# Altium PCB MATRIX-x4.PcbDoc
Units mm, origin at the board's own origin, x right, y up, seen from the top; angles counter-clockwise.
Board outline 140.67 x 35.33 mm, 2 copper layers (Top Layer, Bottom Layer); 23 components, 78 nets, 209 pads, 35 vias.
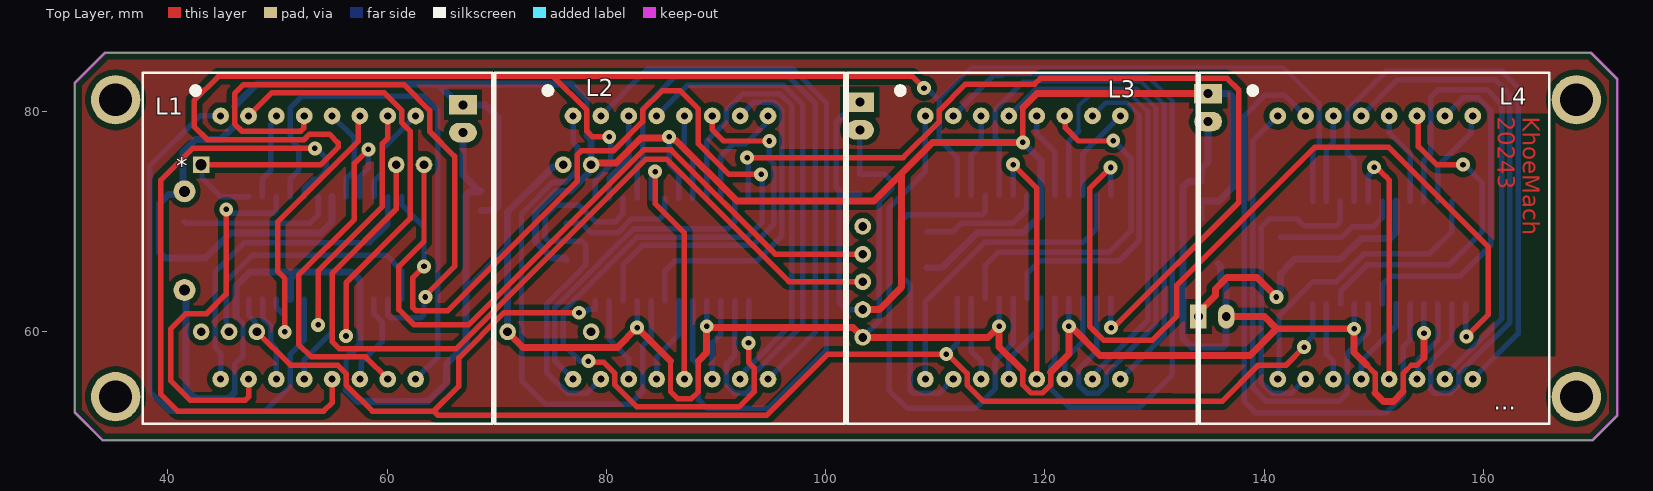
[diagram p0: Top Layer view]
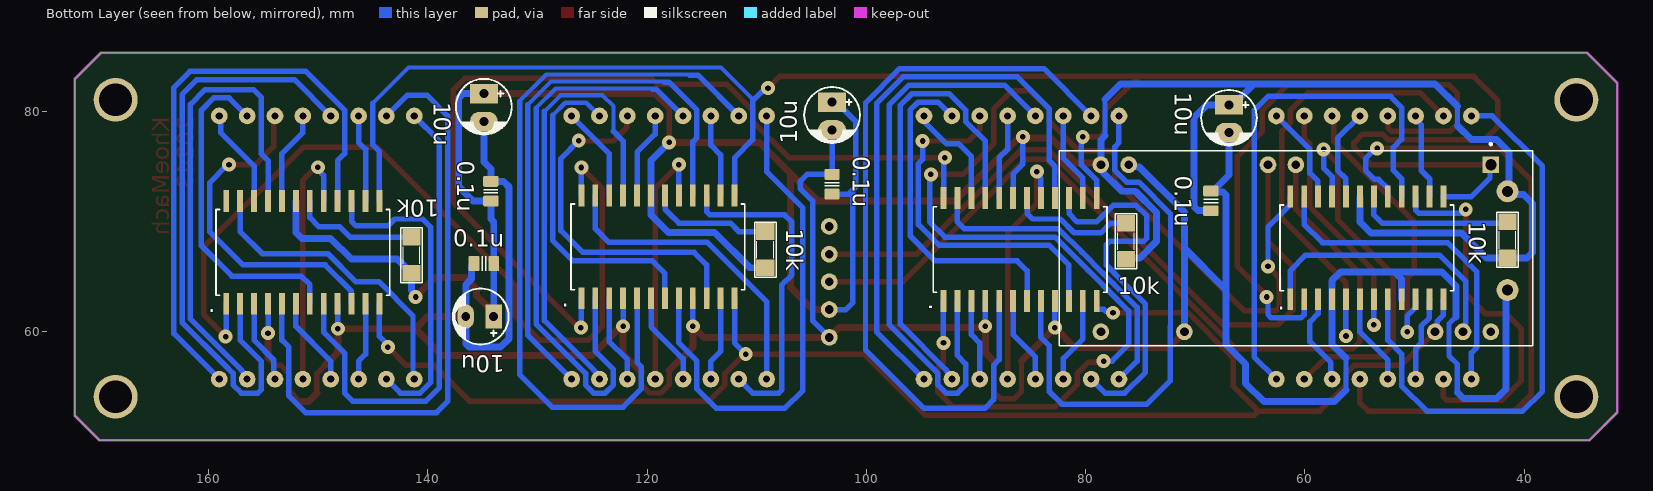
[diagram p1: Bottom Layer view, seen from below]
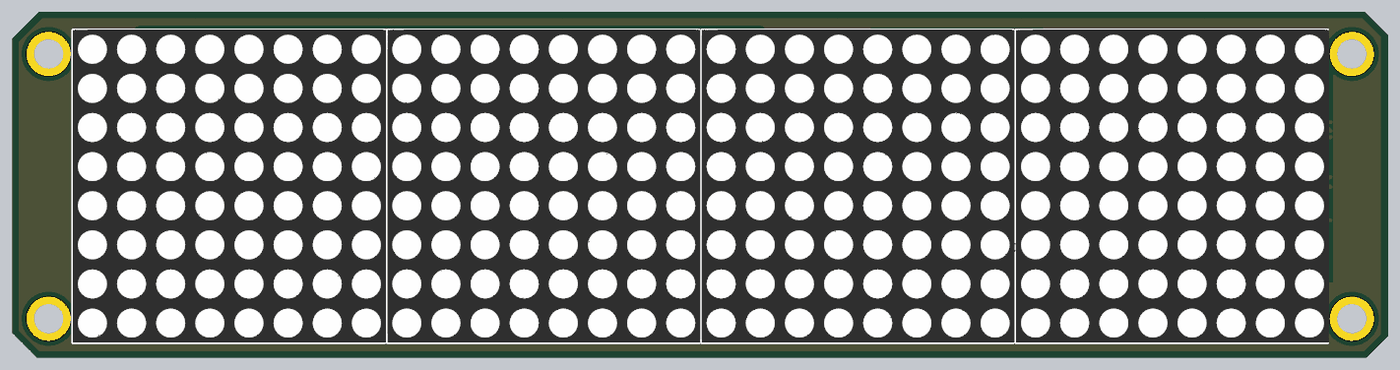
[diagram p2: 3D render of the assembled board from above, using the file's embedded part models]
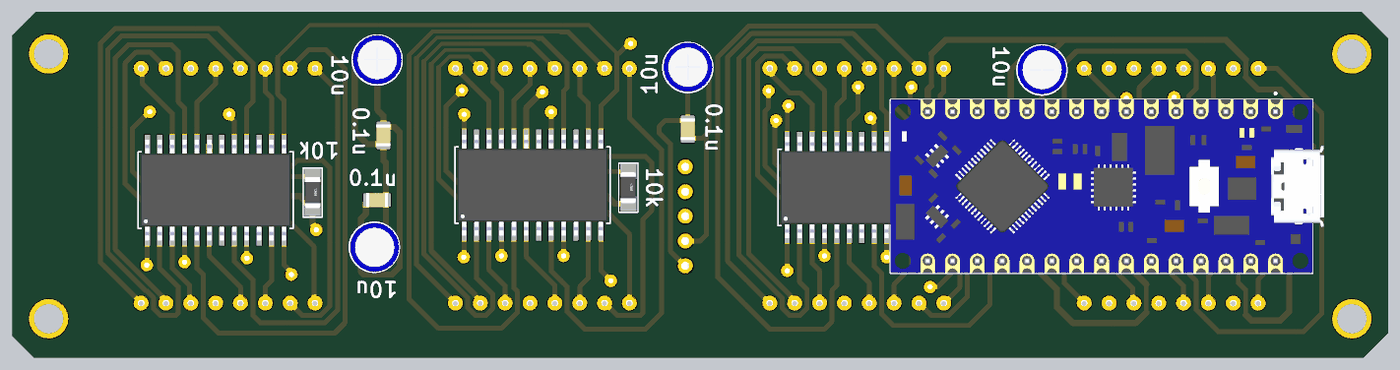
[diagram p3: 3D render of the assembled board from below, using the file's embedded part models]

## Layer stack, top to bottom
Top Solder: solder mask 0.0102, Solder Resist, Dk 3.5
Top Layer: signal copper 0.0356
Dielectric 1: dielectric 0.32, FR-4, Dk 4.8
Bottom Layer: signal copper 0.0356
Bottom Solder: solder mask 0.0102, Solder Resist, Dk 3.5

## Board outline
34.061,50.063 31.521,52.603 31.521,82.626 34.29,85.395 169.774,85.395 172.187,82.982 172.187,52.299 169.951,50.063

## Design rules (kind name [scope] priority, off if disabled: settings)
Clearance [All] p1: gap=0.254 ignorepadtopadclearanceinfootprint=FALSE except(0.508: Arc-Fill Arc-Poly Arc-Region Track-Fill Track-Poly Track-Region SMDPad-Fill SMDPad-Poly SMDPad-Region THPad-Fill THPad-Poly THPad-Region Via-Fill Via-Poly Via-Region Fill-Fill Fill-Poly Fill-Region Poly-Poly Poly-Region Region-Region)
PolygonConnect [All] p1: connectstyle=Relief reliefconductorwidth=0.254 reliefentries=4 polygonreliefangle="90 Angle" airgapwidth=0.254
RoutingVias [All] p1: holewidth=0.711 width=1.27 viastyle="Through Hole" minholewidth=0.5 minwidth=1.27 maxholewidth=0.711 maxwidth=1.27
SilkToSolderMaskClearance [IsText] p1: minsilkscreentomaskgap=0.254 clearancetoexposedcopper=TRUE
SolderMaskExpansion [All] p1: expansion=0.102 istentingtop=FALSE
Width [All] p1: maxlimit=1 minlimit=0.254 preferedwidth=0.5
29 further rules are at their usual default settings.

## Classes and differential pairs
component class MATRIX-x1: 0.1u 10k 10u * . L1 L2 L3 L4

## Components (designator, comment, footprint, x,y, rotation, side; value= is the part's Value field where it differs from the comment)
0.1u "approved sub OK" CAPC2012X135N 134.239,72.771 r90 bottom value=0.1uF (schematic designator C8)
0.1u "approved sub OK" CAPC2012X135N 134.874,66.167 r0 bottom value=0.1uF (schematic designator C6)
0.1u "approved sub OK" CAPC2012X135N 68.58,71.882 r90 bottom value=0.1uF (schematic designator C4)
0.1u "approved sub OK" CAPC2012X135N 103.124,73.406 r90 bottom value=0.1uF (schematic designator C2)
10k "10K" SM-RES-1206 109.22,69.088 r270 bottom value="R1/4W - 1K" (schematic designator R4)
10k "10K" SM-RES-1206 141.478,68.58 r270 bottom value="R1/4W - 1K" (schematic designator R3)
10k "10K" SM-RES-1206 41.529,69.977 r270 bottom value="R1/4W - 1K" (schematic designator R2)
10k "10K" SM-RES-1206 76.327,69.85 r270 bottom value="R1/4W - 1K" (schematic designator R1)
10u "10uF" CP1/2#1 134.874,81.661 r270 bottom (schematic designator C7)
10u "10uF" CP1/2#2 133.985,61.341 r0 bottom (schematic designator C5)
10u "10uF" CP1/2#1 66.929,80.645 r270 bottom (schematic designator C3)
10u "10uF" CP1/2#1 103.124,80.899 r270 bottom (schematic designator C1)
* "module- mini360" MODULE-MINI360 49.022,68.199 r0 top
. "MAX7219" MAX7219 151.384,67.31 r90 bottom (schematic designator M4)
. "MAX7219" MAX7219 118.999,67.818 r90 bottom (schematic designator M3)
. "MAX7219" MAX7219 85.979,67.577 r90 bottom (schematic designator M2)
. "MAX7219" MAX7219 54.356,67.717 r90 bottom (schematic designator M1)
A1 "ARDUINO-NANO" ARDUINO-NANO 60.579,67.945 r0 bottom
D1 "DS1307" DS1307-MODULE 116.378,65.436 r180 bottom
L1 "LEDMATRIX-8X8" LEDMATRIX_8X8 53.213,67.818 r0 top
L2 "LEDMATRIX-8X8" LEDMATRIX_8X8 85.344,67.821 r0 top
L3 "LEDMATRIX-8X8" LEDMATRIX_8X8 117.475,67.821 r0 top
L4 "LEDMATRIX-8X8" LEDMATRIX_8X8 149.606,67.821 r0 top

## Footprints (in the part's own frame and the unit in brackets; to place one, negate y for a bottom-side part, rotate by r counter-clockwise, add the part's x,y. Pads: shape width x height; smd on the part's side, far side on the other; paste and mask are expansions set on the pad)
ARDUINO-NANO [mil]
  rect 60x60 / inner round 60 / far side rect 60x60 hole 40: 1(-690,-285)
  round 60 hole 31.5: 8(10,-285) 9(110,-285) 14(610,-285) 15(710,-285) 16(710,315) 19(410,315) 28(-490,315) 29(-590,315) 30(-690,315)
  silkscreen extent -840,-363 860,365, body extent -885,-335 860,365, height 236
CAPC2012X135N [mm] "Chip Capacitor, Body 2.0x1.2mm, EIA 0805, IPC Medium Density"
  round 0.254 on Mech15: 0(0,0)
  rrect25% 1x1.4 smd: 1(-0.9,0) 2(0.9,0)
  Top Layer pour cut-out: -0.675,0.7 -0.475,0.9 0.475,0.9 0.675,0.7 0.675,-0.7 0.475,-0.9 -0.475,-0.9 -0.675,-0.7
  silkscreen extent -0.15,-0.65 0.15,0.65, body extent -1.1,-0.72 1.1,0.73, height 1.34
CP1/2#1 [mil]
  rect 70x100 hole 32: 1(0,0)
  oval 70x100 hole 32: 2(100,0)
  silkscreen extent -53,-100 146,100, body extent -54,-99 144,100, height 296
CP1/2#2 [mil]
  rect 59.06x86.61 hole 32: 1(0,0)
  oval 59.06x86.61 hole 32: 2(100,0)
  silkscreen extent -53,-100 147,100, body extent -54,-99 144,100, height 296
DS1307-MODULE [mm]
  round 1.524 hole 0.8 mask+0.15: DS(13,4.12) GND(13,-6) SCL(13,1.58) SDA(13,-0.92) VCC(13,-3.46)
LEDMATRIX_8X8 [mil] "3mm"
  round 60 hole 25.59: C1(-30,464.88) C2(-130,-480) C3(-30,-480) C4(270,464.88) C5(170,-480) C6(170,464.88) C7(-230,464.88) C8(-330,464.88) R1(370,464.88) R2(-130,464.88) R3(370,-480) R4(70,464.88) R5(-330,-480) R6(270,-480) R7(-230,-480) R8(70,-480)
  silkscreen extent -610,-640 645,620, body extent -610,-639 650,621, height 239
MAX7219 [mil]
  rect 78x21 smd: 1(-189.5,275) 2(-189.5,225) 3(-189.5,175) 4(-189.5,125) 5(-189.5,75) 6(-189.5,25) 7(-189.5,-25) 8(-189.5,-75) 9(-189.5,-125) 10(-189.5,-175) 11(-189.5,-225) 12(-189.5,-275) 13(179.5,-275) 14(179.5,-225) 15(179.5,-175) 16(179.5,-125) 17(179.5,-75) 18(179.5,-25) 19(179.5,25) 20(179.5,75) 21(179.5,125) 22(179.5,175) 23(179.5,225) 24(179.5,275)
  silkscreen extent -159,-312 149,312, body extent -208,-303 198,303, height 104
MODULE-MINI360 [mm]
  round 2 hole 1 mask+0: 3(-7.493,4.555) 4(-7.493,-4.445)
SM-RES-1206 [mil]
  rect 60x65 smd: 1(0,0) 2(130,0)
  silkscreen extent -34,-38 164,39, body extent 2,-31 128,31, height 40

## Part data
0.1u 0.1u 0.1u 0.1u: library part "CAP C_0805", "Capacitor SMD Cer 1.8nF 10% 50V X7R 0805", Manufacturer 1="AVX Corporation", Manufacturer Part Number 1=08055C182KAT2A, Operating Temperature="-55°C ~ 125°C", Package / Case="0805 (2012 metric)", Ratings="50V; X7R", Supplier Part Number 1=478-1374-1-ND, Tolerance=±10%, SCDType=source*, Supplier 1=Digi-Key
10k 10k 10k 10k: library part R, "Resistor 1/4W"
10u 10u 10u 10u: library part "CAP hoa", "Cap"
D1: library part DS1307_MODULE

## Free pads (board coordinates)
  round 4.5 / inner round 4 / far side round 4 hole 3: ""(35.255,54.026) ""(35.255,81.102) ""(168.453,54.026) ""(168.453,81.102)

## Via types
v1: diameter 1.27, hole 0.508, Top Layer to Bottom Layer, 35 vias

## Nets (pads, with @x,y where several pads share a name; then routed paths per layer and width w, separated by ;. In a path a pad name is that pad's centre, name@x,y a point inside that pad or via, vN(x,y) a via of type N, cw(c..) or ccw(c..) an arc to the next point about the centre after c; other vN are vias at no path point)
5V: 0.1u.1 10k.2 10u.1 *.3 ..19 A1.15 D1.VCC | length 289.3
  Top Layer w0.483: v1(117.983,77.216) 117.983,80.391
  Top Layer w0.635: A1.15 78.778,75.349 80.887,75.349 83.146,77.609 86.012,77.609 86.214,77.406 86.347,77.406 91.897,71.857 104.391,71.857 106.934,74.399 ; D1.VCC 104.902,61.976 106.934,64.008 106.934,74.399 ; v1(117.983,77.216) 109.751,77.216 106.934,74.399 ; 117.983,80.391 119.253,81.661 10u.1@134.874,81.661 ; 10u.1@133.985,61.341 133.985,61.691 135.53,63.236 135.53,63.852 136.575,64.897 139.319,64.897 v1(141.097,63.119)
  Bottom Layer w0.483: 46.097,78.736 46.097,80.514 ; 78.228,77.83 78.228,81.132
  Bottom Layer w0.5: v1(85.725,77.724) 85.725,75.23 86.614,74.341 ..19@86.614,72.136 ; 0.1u.1@103.124,72.506 101.611,72.506 101.219,72.898 ; 10u.1@103.124,80.899 102.743,80.899 100.965,79.121 100.965,73.152 101.219,72.898 ; D1.VCC 101.854,61.976 101.219,62.611 101.219,72.898
  Bottom Layer w0.635: 46.097,78.736 44.831,77.47 42.545,77.47 41.402,76.327 41.402,72.881 *.3 41.242,72.467 40.082,72.467 39.243,71.628 39.243,67.183 39.751,66.675 41.529,66.675 43.434,66.675 45.72,68.961 53.975,68.961 54.991,69.977 ..19@54.991,72.276 ; 46.097,80.514 48.133,82.55 64.643,82.55 ; 0.1u.1@68.58,70.982 68.605,71.007 69.737,71.007 70.104,71.374 70.104,79.502 68.961,80.645 66.929,80.645 66.548,80.645 64.643,82.55 ; 10k.2@76.327,66.548 76.187,66.688 75.044,66.688 73.533,68.199 73.533,70.815 75.481,72.763 76.7,72.763 78.417,74.48 78.417,74.988 A1.15 78.613,77.445 78.228,77.83 ; 78.228,81.132 76.81,82.55 64.643,82.55 ; 10k.2@109.22,65.786 110.617,65.786 113.843,69.012 118.034,69.012 119.634,70.612 119.634,72.377 119.634,75.565 v1(117.983,77.216) ; 10u.1@133.985,61.341 133.974,61.352 133.974,66.167 133.974,69.966 134.239,70.231 134.239,71.871 135.851,71.871 137.168,73.188 137.168,81.272 136.779,81.661 10u.1@134.874,81.661 ; v1(141.097,63.119) 141.097,63.327 141.478,63.708 141.478,65.278 141.541,65.278 141.986,65.722 141.986,65.786 142.773,66.573 146.964,66.573 148.844,68.453 151.472,68.453 152.019,69 ..19@152.019,71.869
A1: ..14@48.641,72.276 L1.R2 | length 7.9
  Bottom Layer w0.5: ..14@48.641,72.276 48.641,73.902 49.399,74.66 49.399,76.081 49.403,76.085 49.403,78.841 49.911,79.349 L1.R2
A2: ..14@80.264,72.136 L2.R2 | length 8.2
  Bottom Layer w0.5: ..14@80.264,72.136 80.281,72.153 80.281,73.995 82.042,75.756 L2.R2
A3: ..14@113.284,72.377 L3.R2 | length 7.6
  Bottom Layer w0.5: ..14@113.284,72.377 113.284,76.073 114.173,76.962 L3.R2
A4: ..14@145.669,71.869 L4.R2 | length 8
  Bottom Layer w0.5: ..14@145.669,71.869 145.669,76.581 146.304,77.216 L4.R2
B1: ..16@51.181,72.276 L1.R3 | length 48.5
  Bottom Layer w0.5: ..16@51.181,72.276 51.181,73.902 51.939,74.66 51.939,76.77 51.185,77.524 51.185,80.395 52.197,81.407 63.373,81.407 64.639,80.141 64.639,57.654 L1.R3
B2: ..16@82.804,72.136 L2.R3 | length 53.2
  Bottom Layer w0.5: ..16@82.804,72.136 82.804,75.057 83.312,75.565 83.312,80.264 86.233,83.185 96.647,83.185 99.06,80.772 99.06,59.947 L2.R3
B3: ..16@115.824,72.377 L3.R3 | length 52
  Bottom Layer w0.381: 118.425,82.719 118.485,82.779 128.754,82.779 130.869,80.664
  Bottom Layer w0.5: ..16@115.824,72.377 115.824,77.272 115.447,77.649 115.447,80.153 118.013,82.719 118.425,82.719 ; L3.R3 130.869,59.625 130.869,80.664
B4: ..16@148.209,71.869 L4.R3 | length 54.5
  Bottom Layer w0.5: ..16@148.209,71.869 148.209,75.565 147.574,76.2 147.574,80.149 151.11,83.685 161.679,83.685 163.15,82.214 163.15,59.775 L4.R3
C1: ..20@56.261,72.276 L1.R4 | length 8.5
  Bottom Layer w0.5: L1.R4 57.019,77.598 57.019,74.66 56.261,73.902 ..20@56.261,72.276
C2: ..20@87.884,72.136 L2.R4 | length 7.8
  Bottom Layer w0.5: L2.R4 87.122,76.581 87.884,75.819 ..20@87.884,72.136
C3: ..20@120.904,72.377 L3.R4 | length 7.9
  Bottom Layer w0.5: L3.R4 119.253,77.978 120.904,76.327 ..20@120.904,72.377
C4: ..20@153.289,71.869 L4.R4 | length 8.5
  Bottom Layer w0.5: L4.R4 151.384,78.105 153.289,76.2 ..20@153.289,71.869
CLK: ..13 A1.1 | length 176.6
  Top Layer w0.5: A1.1 53.975,75.184 55.546,76.755 55.546,77.169 54.737,77.978 52.933,77.978 52.413,77.458 43.612,77.458 42.418,78.652 42.418,81.026 44.628,83.236 75.146,83.236 ; v1(80.264,77.724) 78.74,77.724 78.232,78.232 78.232,80.149 75.146,83.236 ; v1(108.966,82.169) 107.899,83.236 75.146,83.236
  Bottom Layer w0.381: 110.367,81.157 113.259,84.049 141.757,84.049 145.03,80.776
  Bottom Layer w0.5: A1.1 43.129,75.108 43.129,73.965 44.818,72.276 ..13@47.371,72.276 ; ..13@78.994,72.136 78.994,73.775 80.391,75.172 80.391,77.597 v1(80.264,77.724) ; v1(108.966,82.169) 109.174,82.169 109.539,81.804 109.56,81.804 110.207,81.157 110.367,81.157 110.367,77.459 112.014,75.812 ..13@112.014,72.377 ; ..13@144.399,71.869 144.399,76.377 145.03,77.008 145.03,80.776
D1: ..23@60.071,72.276 L1.R5 | length 30.1
  Bottom Layer w0.5: L1.R5 44.831,58.032 44.327,58.536 44.327,65.409 46.99,68.072 58.42,68.072 60.071,69.723 ..23@60.071,72.276
D2: ..23@91.694,72.136 L2.R5 | length 29
  Bottom Layer w0.5: L2.R5 75.311,57.28 75.311,62.165 77.497,64.351 78.41,65.265 80.346,67.2 82.48,69.334 91.051,69.334 91.694,69.977 ..23@91.694,72.136
D3: ..23@124.714,72.377 L3.R5 | length 28.5
  Bottom Layer w0.5: L3.R5 109.093,62.688 114.528,68.123 123.495,68.123 124.714,69.342 ..23@124.714,72.377
D4: ..23@157.099,71.869 L4.R5 | length 27.5
  Bottom Layer w0.5: L4.R5 141.338,55.743 141.338,61.406 144.456,64.524 146.566,64.524 149.104,67.062 155.073,67.062 157.099,69.088 ..23@157.099,71.869
DIG01: ..2@60.071,62.904 L1.C1 | length 55.3
  Top Layer w0.5: L1.C1 52.414,79.589 52.414,78.525 52.121,78.232 46.779,78.232 46.105,78.906 46.105,81.665 46.922,82.482 61.546,82.482 63.881,80.146 63.881,78.232 66.167,75.946 66.167,65.913 63.496,63.242 v1(63.496,63.119)
  Bottom Layer w0.5: ..2@60.071,62.904 60.088,62.887 60.088,61.507 60.381,61.214 63.08,61.214 63.373,61.507 63.373,62.996 v1(63.496,63.119)
DIG02: ..2@91.694,62.763 L2.C1 | length 53.7
  Bottom Layer w0.5: L2.C1 87.376,82.423 96.15,82.423 97.909,80.664 97.909,60.586 93.476,56.153 93.476,55.113 92.726,54.363 91.678,54.363 90.936,55.105 90.936,57.027 91.694,57.785 ..2@91.694,62.763
DIG03: ..2@124.714,63.005 L3.C1 | length 54
  Bottom Layer w0.381: 119.462,82.084 119.521,82.144 128.322,82.144 130.115,80.351
  Bottom Layer w0.5: L3.C1 119.168,82.084 119.462,82.084 ; ..2@124.714,63.005 124.714,58.166 123.067,56.519 123.067,55.105 123.809,54.363 124.857,54.363 125.607,55.113 125.607,56.153 130.115,60.661 130.115,80.351
DIG04: ..2@157.099,62.497 L4.C1 | length 55.5
  Bottom Layer w0.5: L4.C1 152.146,82.931 161.036,82.931 162.396,81.571 162.396,60.796 158.495,56.895 158.48,56.895 157.738,56.153 157.738,55.113 156.988,54.363 155.491,54.363 155.198,54.656 155.198,57.281 157.099,59.182 ..2@157.099,62.497
DIG11: ..11@48.641,62.904 L1.C2 | length 7.8
  Bottom Layer w0.5: ..11@48.641,62.904 48.658,62.887 48.658,61.21 49.407,60.46 49.407,58.902 49.911,58.398 L1.C2
DIG12: ..11@80.264,62.763 L2.C2 | length 7.9
  Bottom Layer w0.5: ..11@80.264,62.763 80.264,59.309 82.042,57.531 L2.C2
DIG13: ..11@113.284,63.005 L3.C2 | length 7.7
  Bottom Layer w0.5: ..11@113.284,63.005 113.284,58.166 114.173,57.277 L3.C2
DIG14: ..11@145.669,62.497 L4.C2 | length 7.1
  Bottom Layer w0.5: ..11@145.669,62.497 145.669,57.912 146.304,57.277 L4.C2
DIG21: ..6@54.991,62.904 L1.C3 | length 8.3
  Bottom Layer w0.5: L1.C3 52.451,57.392 54.991,59.932 ..6@54.991,62.904
DIG22: ..6@86.614,62.763 L2.C3 | length 8
  Bottom Layer w0.5: L2.C3 84.582,57.658 86.614,59.69 ..6@86.614,62.763
DIG23: ..6@119.634,63.005 L3.C3 | length 8.6
  Bottom Layer w0.5: L3.C3 116.713,57.481 119.634,60.402 ..6@119.634,63.005
DIG24: ..6@152.019,62.497 L4.C3 | length 8.2
  Bottom Layer w0.5: L4.C3 148.844,57.277 152.019,60.452 ..6@152.019,62.497
DIG31: ..7@53.721,62.904 L1.C4 | length 24
  Top Layer w0.5: v1(53.715,60.573) 53.715,65.501 59.559,71.345 59.559,77.085 60.071,77.597 L1.C4
  Bottom Layer w0.5: v1(53.715,60.573) 53.718,60.576 53.718,62.901 ..7@53.721,62.904
DIG32: ..7@85.344,62.763 L2.C4 | length 30.8
  Bottom Layer w0.5: ..7@85.344,62.763 85.344,65.507 86.258,66.421 93.726,66.421 96.008,68.703 96.008,80.153 95.266,80.895 93.468,80.895 L2.C4
DIG33: ..7@118.364,63.005 L3.C4 | length 30.4
  Bottom Layer w0.381: L3.C4 125.539,80.835 127.457,80.835 128.607,79.686
  Bottom Layer w0.5: ..7@118.364,63.005 118.364,65.278 119.507,66.421 126.746,66.421 128.607,68.282 128.607,79.686
DIG34: ..7@150.749,62.497 L4.C4 | length 30.8
  Bottom Layer w0.5: ..7@150.749,62.497 150.749,64.237 151.536,65.024 157.861,65.024 160.647,67.81 160.647,80.145 159.512,81.28 158.115,81.28 L4.C4
DIG41: ..3@58.801,62.904 L1.C5 | length 8.4
  Bottom Layer w0.5: L1.C5 57.646,55.741 57.646,57.138 59.559,59.051 59.559,60.849 58.812,61.597 58.812,62.893 ..3@58.801,62.904
DIG42: ..3@90.424,62.763 L2.C5 | length 7.5
  Bottom Layer w0.5: L2.C5 89.662,58.928 90.424,59.69 ..3@90.424,62.763
DIG43: ..3@123.444,63.005 L3.C5 | length 8.1
  Bottom Layer w0.5: L3.C5 121.793,57.404 123.444,59.055 ..3@123.444,63.005
DIG44: ..3@155.829,62.497 L4.C5 | length 7.7
  Bottom Layer w0.5: L4.C5 154.043,55.748 154.043,57.396 155.829,59.182 ..3@155.829,62.497
DIG51: ..10@49.911,62.904 L1.C6 | length 26.3
  Top Layer w0.5: v1(50.673,59.944) 50.673,64.848 50.018,65.503 50.018,69.957 57.399,77.338 57.399,79.494 L1.C6
  Bottom Layer w0.5: ..10@49.911,62.904 49.911,62.18 50.673,61.418 v1(50.673,59.944)
DIG52: ..10@81.534,62.763 L2.C6 | length 33.2
  Top Layer w0.5: L2.C6 89.662,78.359 90.678,77.343 v1(94.869,77.343)
  Bottom Layer w0.5: ..10@81.534,62.763 81.534,66.04 83.312,67.818 93.345,67.818 95.246,69.719 95.246,75.29 94.869,75.667 v1(94.869,77.343)
DIG53: ..10@114.554,63.005 L3.C6 | length 32.5
  Top Layer w0.5: L3.C6 121.854,79.568 121.854,78.552 123.063,77.343 126.198,77.343 v1(126.225,77.37)
  Bottom Layer w0.5: ..10@114.554,63.005 114.554,66.04 115.697,67.183 125.857,67.183 127.853,69.179 127.853,75.742 v1(126.225,77.37)
DIG54: ..10@146.939,62.497 L4.C6 | length 30.8
  Top Layer w0.5: L4.C6 154.051,79.502 154.051,76.835 155.702,75.184 v1(158.115,75.184)
  Bottom Layer w0.5: ..10@146.939,62.497 146.956,62.513 146.956,63.644 149.352,66.04 156.845,66.04 159.893,69.088 159.893,73.533 158.242,75.184 v1(158.115,75.184)
DIG61: ..5@56.261,62.904 L1.C7 | length 42.2
  Top Layer w0.5: L1.C7 49.473,81.728 59.76,81.728 61.337,80.15 61.337,79.01 62.103,78.244 62.103,70.259 56.261,64.417 v1(56.261,59.563)
  Bottom Layer w0.5: v1(56.261,59.563) ..5@56.261,62.904
DIG62: ..5@87.884,62.763 L2.C7 | length 69.6
  Bottom Layer w0.5: L2.C7 83.812,83.939 96.959,83.939 100.076,80.822 100.076,58.293 94.742,52.959 89.193,52.959 88.396,53.756 88.396,56.892 87.884,57.404 ..5@87.884,62.763
DIG63: ..5@120.904,63.005 L3.C7 | length 68.9
  Bottom Layer w0.381: 116.09,83.354 116.149,83.414 129.185,83.414 131.623,80.976
  Bottom Layer w0.5: L3.C7 115.358,83.354 116.09,83.354 ; ..5@120.904,63.005 120.904,57.15 120.527,56.773 120.527,54.733 122.174,53.086 128.651,53.086 131.623,56.058 131.623,80.976
DIG64: ..5@153.289,62.497 L4.C7 | length 57.4
  Bottom Layer w0.5: L4.C7 141.859,81.534 140.081,81.534 138.176,79.629 138.176,53.594 139.192,52.578 151.13,52.578 152.654,54.102 152.654,58.547 153.289,59.182 ..5@153.289,62.497
DIG71: ..8@52.451,62.904 L1.C8 | length 51.9
  Bottom Layer w0.5: L1.C8 44.828,79.629 42.926,79.629 38.354,75.057 38.354,54.522 40.171,52.705 48.895,52.705 51.185,54.995 51.185,57.916 52.451,59.182 ..8@52.451,62.904
DIG72: ..8@84.074,62.763 L2.C8 | length 48.1
  Bottom Layer w0.5: L2.C8 76.962,77.194 77.339,76.817 77.339,76.278 77.343,76.274 77.343,74.664 76.264,73.584 75.141,73.584 72.263,70.707 72.263,60.464 72.267,60.46 72.267,55.495 74.422,53.34 82.169,53.34 83.308,54.479 83.308,58.67 84.074,59.436 ..8@84.074,62.763
DIG73: ..8@117.094,63.005 L3.C8 | length 46.4
  Bottom Layer w0.5: L3.C8 109.093,74.549 105.791,71.247 105.791,54.61 107.442,52.959 113.665,52.959 115.447,54.741 115.447,57.281 117.094,58.928 ..8@117.094,63.005
DIG74: ..8@149.479,62.497 L4.C8 | length 44.1
  Bottom Layer w0.5: L4.C8 138.93,77.335 138.93,54.872 140.193,53.609 146.827,53.609 147.57,54.352 147.57,57.996 149.479,59.905 ..8@149.479,62.497
DIN1: ..1@61.341,62.904 A1.29 | length 24.9
  Bottom Layer w0.5: A1.29 45.397,60.14 45.397,60.691 45.339,60.749 45.339,64.516 47.752,66.929 59.944,66.929 61.341,65.532 ..1@61.341,62.904
DIN2: ..1@92.964,62.763 ..24@61.341,72.276 | length 117
  Top Layer w0.5: v1(63.373,65.913) 62.357,64.897 62.357,62.142 62.65,61.849 65.532,61.849 77.339,73.656 77.339,76.069 77.724,76.454 80.657,76.454 83.312,79.109 83.312,80.149 85.078,81.915 86.741,81.915 88.392,80.264 88.392,77.089 91.186,74.295 v1(94.107,74.295) ; v1(78.359,57.277) 78.459,57.177 79.744,57.177 80.776,56.145 80.776,55.105 82.787,53.094 92.083,53.094 93.091,54.102 93.468,54.479 93.468,56.66 92.964,57.164 v1(92.964,58.928)
  Bottom Layer w0.5: ..24@61.341,72.276 61.341,71.552 63.373,69.52 v1(63.373,65.913) ; v1(78.359,57.277) 77.597,57.277 76.073,58.801 76.073,61.861 77.809,63.597 79.164,64.953 79.744,65.532 82.792,68.58 92.837,68.58 94.234,69.977 94.234,74.168 v1(94.107,74.295) ; v1(92.964,58.928) ..1@92.964,62.763
DIN3: ..1@125.984,63.005 ..24@92.964,72.136 | length 81.9
  Top Layer w0.5: v1(92.837,75.823) 92.841,75.819 107.073,75.819 110.359,79.105 110.359,80.145 112.738,82.525 119.05,82.525 119.58,83.054 136.617,83.054 137.668,82.003 137.668,71.755 126.234,60.321 v1(126.027,60.321)
  Bottom Layer w0.5: v1(92.837,75.823) 92.947,75.713 92.947,72.153 ..24@92.964,72.136 ; ..1@125.984,63.005 126.001,62.988 126.001,60.348 v1(126.027,60.321)
DIN4: ..1@158.369,62.497 ..24@125.984,72.377 | length 79.4
  Top Layer w0.5: v1(125.984,74.93) 124.079,73.025 124.079,60.452 125.349,59.182 129.794,59.182 132.017,61.404 132.017,64.198 144.602,76.784 151.333,76.784 160.401,67.716 160.401,61.493 v1(158.42,59.512)
  Bottom Layer w0.5: ..24@125.984,72.377 v1(125.984,74.93) ; ..1@158.369,62.497 158.386,62.48 158.386,59.546 v1(158.42,59.512)
DP1: ..22@58.801,72.276 L1.R1 | length 8.9
  Bottom Layer w0.5: ..22@58.801,72.276 58.818,72.293 58.818,73.677 59.563,74.422 59.563,76.578 L1.R1
DP2: ..22@90.424,72.136 L2.R1 | length 10
  Bottom Layer w0.5: ..22@90.424,72.136 90.424,75.946 91.567,77.089 92.71,77.089 94.546,78.925 94.546,79.433 L2.R1
DP3: ..22@123.444,72.377 L3.R1 | length 8.7
  Bottom Layer w0.5: ..22@123.444,72.377 123.444,76.2 L3.R1
DP4: ..22@155.829,71.869 L4.R1 | length 9.1
  Bottom Layer w0.5: ..22@155.829,71.869 155.829,75.057 158.889,78.117 158.889,79.514 L4.R1
E1: ..21@57.531,72.276 L1.R6 | length 34.5
  Top Layer w0.5: v1(58.293,76.581) 57.019,75.307 57.019,70.201 51.943,65.125 51.943,58.801 53.094,57.65 58.047,57.65 L1.R6
  Bottom Layer w0.5: ..21@57.531,72.276 57.531,74.105 58.293,74.867 v1(58.293,76.581)
E2: ..21@89.154,72.136 L2.R6 | length 42.7
  Bottom Layer w0.5: ..21@89.154,72.136 89.154,77.331 90.936,79.113 90.936,80.153 92.432,81.649 95.858,81.649 96.901,80.606 96.901,60.645 92.722,56.466 92.722,56.426 92.202,55.906 L2.R6
E3: ..21@122.174,72.377 L3.R6 | length 42.3
  Bottom Layer w0.381: 123.063,78.232 123.063,80.518 124.054,81.509 127.891,81.509 129.361,80.039
  Bottom Layer w0.5: ..21@122.174,72.377 122.174,77.343 123.063,78.232 ; L3.R6 124.333,55.906 124.853,56.426 124.853,56.466 129.361,60.974 129.361,80.039
E4: ..21@154.559,71.869 L4.R6 | length 44.2
  Bottom Layer w0.5: ..21@154.559,71.869 154.559,75.565 155.194,76.2 155.194,81.356 155.872,82.034 160.293,82.034 161.642,80.685 161.642,61.124 156.984,56.466 156.984,56.426 156.464,55.906 L4.R6
F1: ..15@49.911,72.276 L1.R7 | length 34.5
  Top Layer w0.5: v1(45.339,71.116) 45.339,63.373 43.561,61.595 41.656,61.595 40.259,60.198 40.259,55.499 42.037,53.721 47.078,53.721 47.371,54.014 L1.R7
  Bottom Layer w0.5: v1(45.339,71.116) 45.716,70.739 49.618,70.739 49.911,71.032 ..15@49.911,72.276 ; L1.R7@47.36,55.615 L1.R7
F2: ..15@81.534,72.136 L2.R7 | length 35.2
  Bottom Layer w0.5: L2.R7 78.236,54.363 76.438,54.363 74.549,56.252 74.549,62.47 77.361,65.282 77.656,65.577 78.105,66.026 78.105,67.906 77.812,68.199 74.715,68.199 74.422,68.492 74.422,70.485 75.438,71.501 77.47,71.501 78.994,69.977 80.772,69.977 81.517,70.722 81.517,72.119 ..15@81.534,72.136
F3: ..15@114.554,72.377 L3.R7 | length 29.9
  Bottom Layer w0.5: L3.R7 110.367,54.363 107.989,54.363 107.696,54.656 107.696,64.248 106.799,65.145 106.799,69.969 107.442,70.612 114.261,70.612 114.554,70.905 ..15@114.554,72.377
F4: ..15@146.939,71.869 L4.R7 | length 29
  Bottom Layer w0.5: L4.R7 142.498,54.363 140.7,54.363 139.7,55.363 139.7,69.469 140.462,70.231 143.002,70.231 143.637,69.596 146.519,69.596 146.939,70.016 ..15@146.939,71.869
G1: ..17@52.451,72.276 L1.R8 | length 59.5
  Top Layer w0.5: v1(53.424,76.665) 53.384,76.704 42.287,76.704 39.37,73.787 39.37,54.229 40.894,52.705 54.229,52.705 54.991,53.467 L1.R8
  Bottom Layer w0.5: ..17@52.451,72.276 52.451,73 53.289,73.838 53.658,73.838 54.479,74.66 54.479,75.761 53.576,76.665 v1(53.424,76.665)
G2: ..17@84.074,72.136 L2.R8 | length 22.6
  Top Layer w0.5: v1(84.455,74.553) 84.455,71.628 87.122,68.961 L2.R8
  Bottom Layer w0.5: ..17@84.074,72.136 84.074,73.964 84.455,74.345 v1(84.455,74.553)
G3: ..17@117.094,72.377 L3.R8 | length 23.3
  Top Layer w0.5: v1(117.094,75.184) 119.253,73.025 L3.R8
  Bottom Layer w0.5: ..17@117.094,72.377 v1(117.094,75.184)
G4: ..17@149.479,71.869 L4.R8 | length 23.3
  Top Layer w0.5: v1(150.007,74.95) 150.215,74.95 151.025,74.141 151.03,74.141 151.384,73.787 L4.R8
  Bottom Layer w0.5: ..17@149.479,71.869 149.479,74.214 150.007,74.742 v1(150.007,74.95)
GND: 0.1u.2 10u.2 *.4 ..4 ..9 A1.14 A1.19 D1.GND | length 301.2
  Top Layer w0.483: 85.848,57.281 85.848,54.487 86.487,53.848 87.757,53.848 88.388,54.479 88.388,57.273 ; 117.983,56.411 117.983,55.109 118.729,54.363 119.777,54.363 120.519,55.105 120.519,56.257 ; 149.368,56.895 150.11,56.153 150.11,54.36 ; 152.658,54.487 152.658,56.153 153.401,56.896 153.924,56.896 154.579,57.551
  Top Layer w0.635: A1.19 72.415,58.522 81.001,58.522 v1(82.804,60.325) 85.848,57.281 ; 88.388,57.273 89.154,58.039 v1(89.154,60.452) 89.281,60.325 102.489,60.325 D1.GND 114.808,59.436 v1(115.824,60.452) 115.824,58.57 117.983,56.411 ; 120.519,56.257 122.174,57.912 v1(122.174,60.452) 122.355,60.452 125.022,57.785 138.684,57.785 141.121,60.222 ; 10u.2@136.525,61.341 140.002,61.341 141.121,60.222 ; 149.368,56.895 149.353,56.895 148.185,58.063 v1(148.185,60.222) 141.121,60.222 ; 150.11,54.36 150.876,53.594 151.765,53.594 152.658,54.487 ; v1(154.559,59.817) 154.579,59.797 154.579,57.551
  Bottom Layer w0.483: 46.105,54.399 46.105,56.981 46.867,57.743 46.867,60.677 46.228,61.316 ; 56.265,54.654 56.265,57.535
  Bottom Layer w0.5: ..9@82.787,62.78 82.804,62.763 v1(82.804,60.325) ; v1(89.154,60.452) ..4@89.154,62.763 ; 10u.2@103.124,78.359 103.124,74.306 105.399,74.306 106.045,73.66 106.045,73.025 104.902,71.882 104.902,60.96 D1.GND ; v1(115.824,60.452) ..9@115.824,63.005 ; v1(122.174,60.452) ..4@122.174,63.005 ; v1(148.185,60.222) 148.197,60.234 148.197,62.485 ..9@148.209,62.497 ; v1(154.559,59.817) ..4@154.559,62.497
  Bottom Layer w0.635: *.4 41.656,63.627 41.656,54.737 42.545,53.848 45.554,53.848 46.105,54.399 ; 46.228,61.316 46.228,64.135 47.498,65.405 51.816,65.405 ; ..9@51.181,62.904 51.181,64.77 51.816,65.405 ; 56.265,54.654 57.325,53.594 63.754,53.594 65.405,55.245 65.405,57.023 67.187,58.805 67.187,63.758 ; 56.265,57.535 57.531,58.801 57.531,62.904 57.531,64.643 56.769,65.405 51.816,65.405 ; 10u.2@66.929,78.105 66.929,74.233 0.1u.2@68.38,72.782 ; 0.1u.2@68.58,72.782 0.1u.2@68.38,72.782 ; A1.19@70.993,60.325 70.993,67.564 ; A1.14 75.885,74.996 75.123,74.996 70.993,70.866 70.993,67.564 ; 10u.2@134.874,79.121 134.874,75.438 134.239,74.803 134.239,73.671 134.214,73.646 133.082,73.646 132.564,73.128 132.564,59.333 133.35,58.547 136.232,58.547 136.525,58.84 136.525,61.341 136.525,64.262 136.024,64.763 136.024,65.917 0.1u.2@135.774,66.167 ; 67.187,63.758 70.993,67.564 ; 67.187,63.758 67.183,63.762 67.183,72.406 67.476,72.699 68.297,72.699 0.1u.2@68.38,72.782
ISET1: 10k.1@41.529,69.977 ..18@53.721,72.276 | length 14.2
  Bottom Layer w0.5: 10k.1@41.529,69.977 41.656,69.85 52.959,69.85 53.721,70.612 ..18@53.721,72.276
ISET2: 10k.1@76.327,69.85 ..18@85.344,72.136 | length 11.5
  Bottom Layer w0.5: 10k.1@76.327,69.85 77.724,69.85 78.613,68.961 81.04,68.961 82.31,70.231 84.836,70.231 85.327,70.722 85.327,72.119 ..18@85.344,72.136
ISET3: 10k.1@109.22,69.088 ..18@118.364,72.377 | length 11.2
  Bottom Layer w0.5: 10k.1@109.22,69.088 111.633,69.088 112.395,69.85 117.094,69.85 117.881,70.637 117.881,70.654 118.347,71.121 118.347,72.361 ..18@118.364,72.377
ISET4: 10k.1@141.478,68.58 ..18@150.749,71.869 | length 11.5
  Bottom Layer w0.5: 10k.1@141.478,68.58 147.066,68.58 148.031,69.545 149.936,69.545 150.749,70.358 ..18@150.749,71.869
LOAD: ..12 A1.28 | length 139.9
  Top Layer w0.5: A1.28 51.181,56.896 55.245,56.896 55.249,56.892 55.515,56.892 56.265,56.142 56.265,55.102 58.662,52.705 64.262,52.705 ; v1(77.507,61.685) 70.675,61.685 66.548,57.557 66.548,54.991 64.262,52.705 ; v1(143.637,58.547) 141.985,56.895 139.445,56.895 136.144,53.594 131.522,53.594 131.507,53.609 114.403,53.609 112.907,55.105 112.907,56.145 111.394,57.658 111.252,57.658 v1(110.998,57.912) 100.203,57.912 94.631,52.34 64.627,52.34 64.262,52.705
  Bottom Layer w0.5: ..12@47.371,62.904 47.371,61.468 47.945,60.894 47.945,60.132 A1.28 ; v1(77.507,61.685) 77.655,61.832 78.165,61.832 78.356,62.023 78.977,62.023 78.994,62.039 ..12@78.994,62.763 ; v1(110.998,57.912) 112.014,58.928 ..12@112.014,63.005 ; v1(143.637,58.547) 143.637,58.755 144.399,59.517 ..12@144.399,62.497
SCL: A1.9 D1.SCL | length 67.6
  Top Layer w0.5: A1.9 63.373,68.199 61.087,65.913 61.087,61.976 62.484,60.579 67.437,60.579 83.388,76.53 85.903,76.53 95.417,67.016 D1.SCL
SDA: A1.8 D1.SDA | length 79
  Top Layer w0.5: A1.8 60.833,71.12 54.991,65.278 54.991,59.055 55.642,58.404 66.328,58.404 83.616,75.692 85.471,75.692 96.647,64.516 D1.SDA
pads on no net: 0.1u.0 ..24@158.369,71.869 A1.16 A1.30 D1.DS

## Polygon pours and split planes (outlines as drawn)
no net on Top Layer "NONET_L01_P000" (solid, pour order 0): 33.833,84.938 33.833,84.912 32.182,83.261 32.207,83.236 32.207,51.892 34.061,50.038 34.087,50.063 169.977,50.063 171.475,51.562 171.425,51.613 171.425,83.718 170.18,84.963

## Keep-outs
Keep-Out Layer:
  the board outline again, w0.254

## Other copper
Top Layer:
  text "KhoeMach  / 20243" at 161.265,79.575 h1.52 r270

## Silkscreen, mask and mechanical layers (free items; w line width, h text height)
Top Overlay:
  text "..." at 160.909,52.832 h1.52